# Altium PCB EpicPlus2.PcbDoc
Units mil, origin at the board's own origin, x right, y up, seen from the top; angles counter-clockwise.
Board outline 2500 x 1600 mil, 4 copper layers (Top Layer, Internal Plane 1, Internal Plane 2, Bottom Layer); 56 components, 96 nets, 236 pads, 16 vias.
Unrouted connection lines stored in the file: 123.
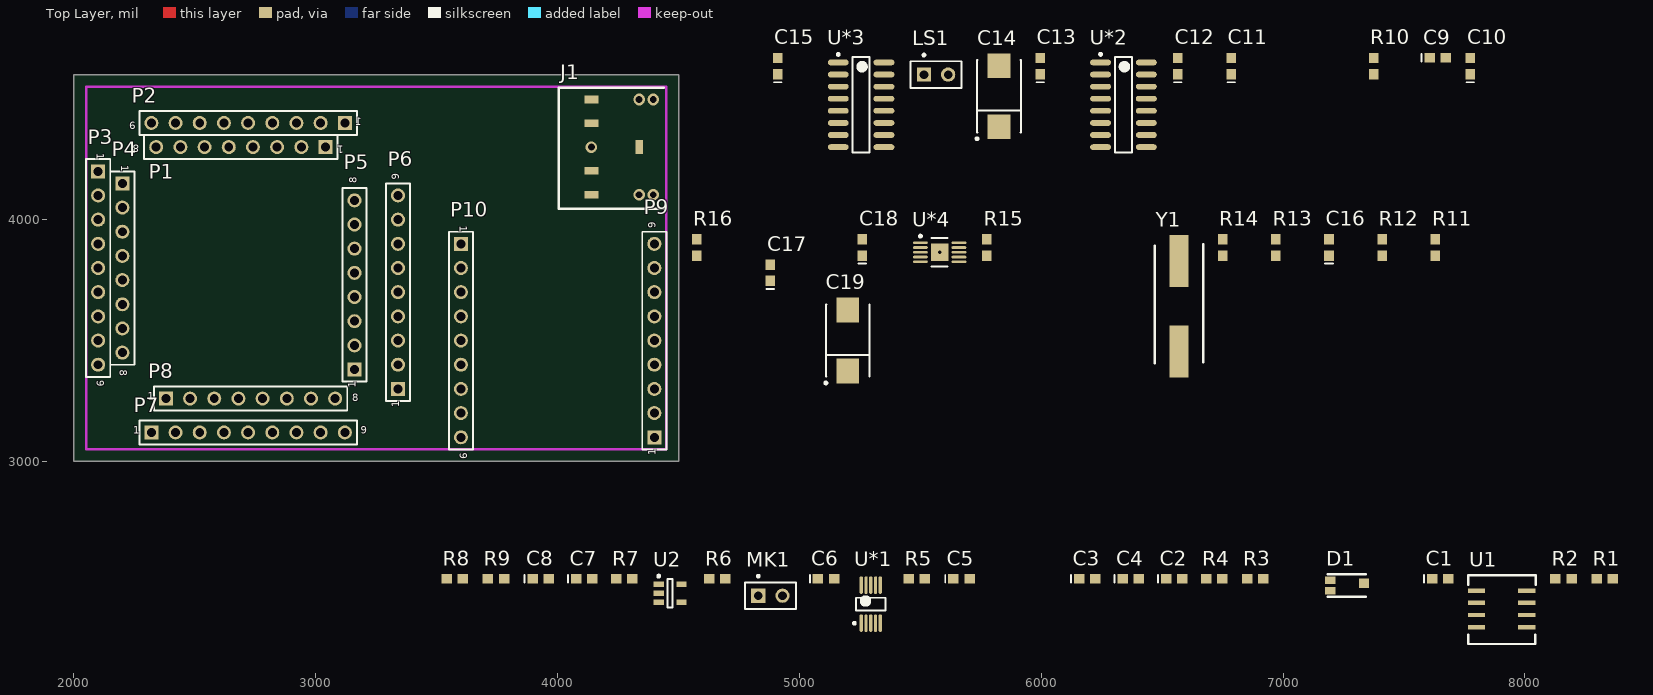
[diagram p0: Top Layer view]
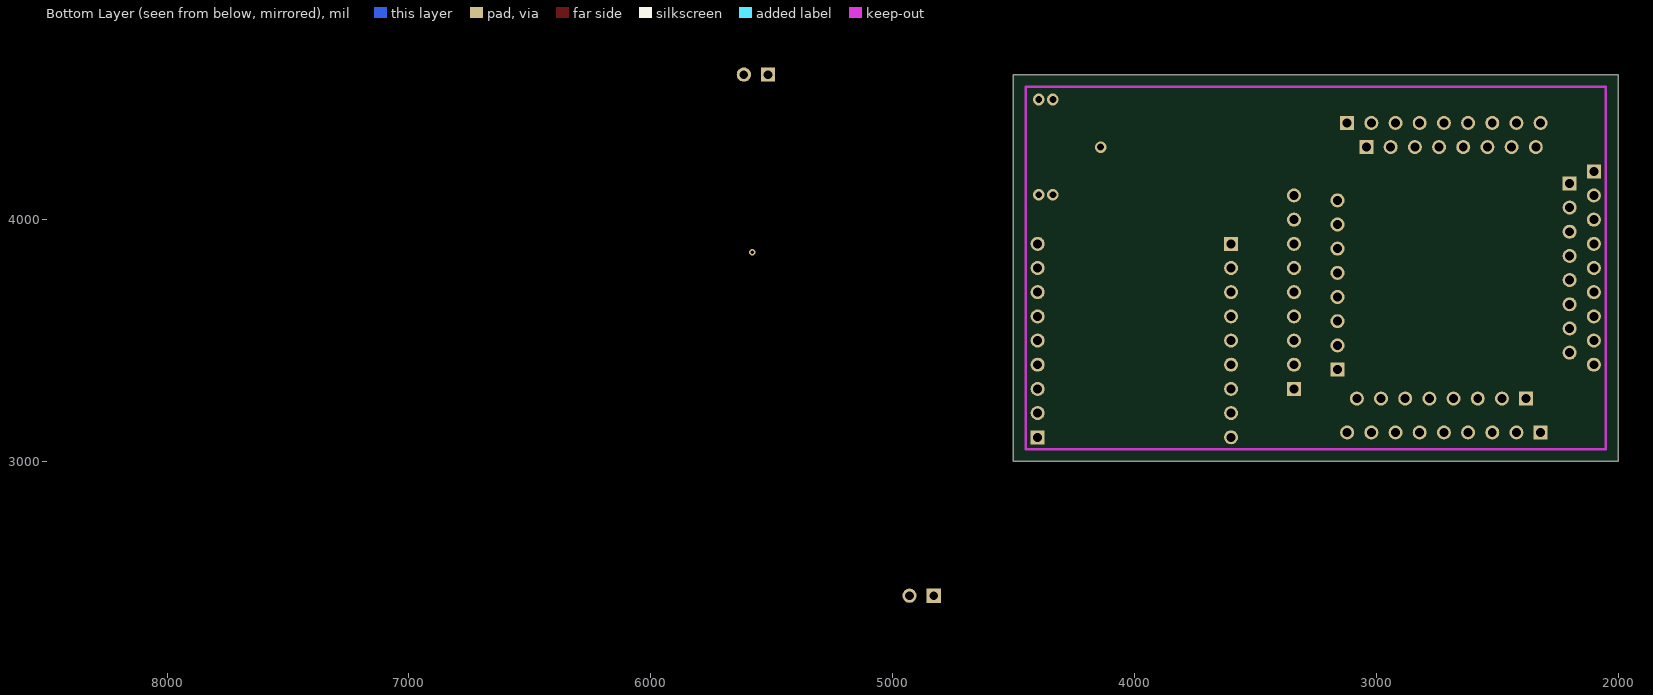
[diagram p1: Bottom Layer view, seen from below]
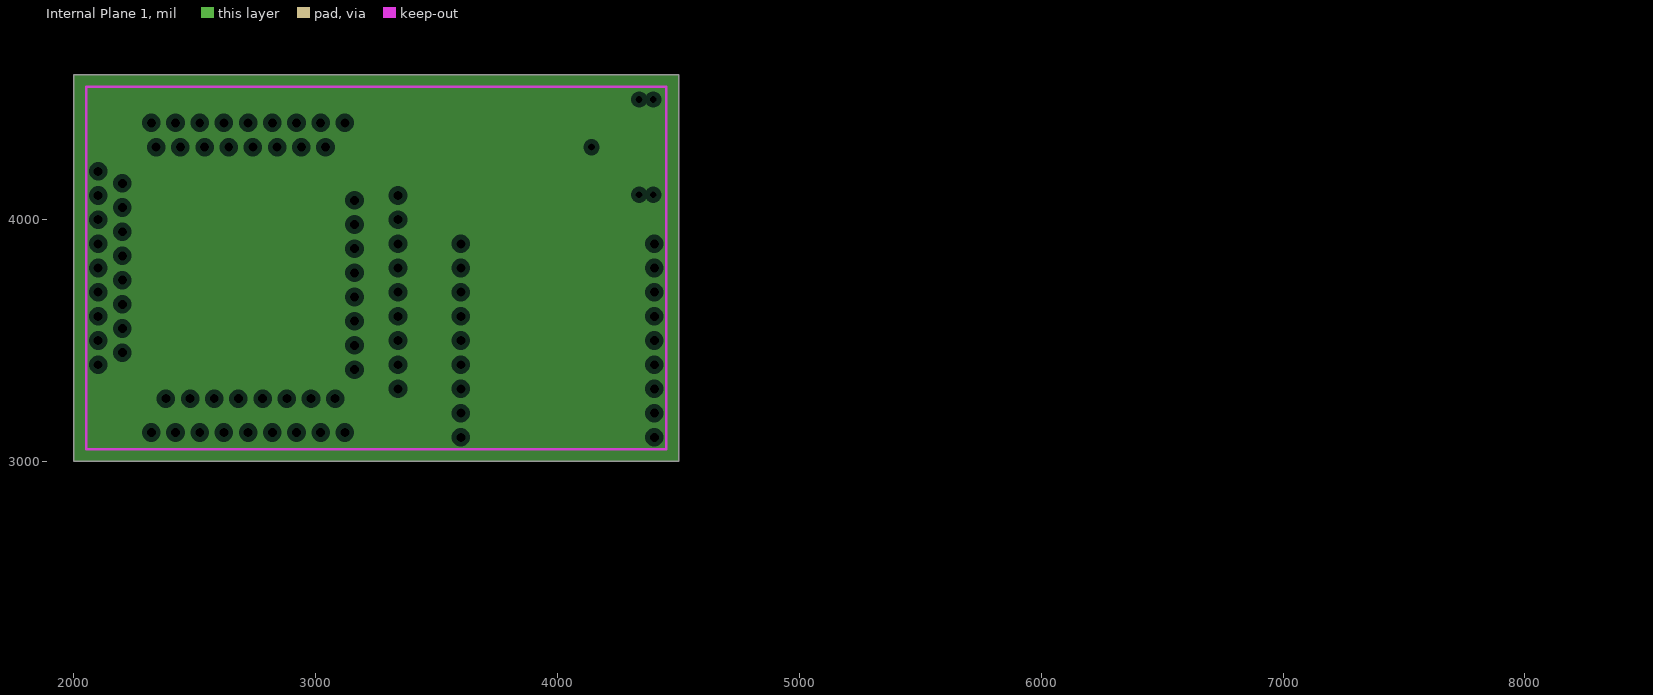
[diagram p2: Internal Plane 1, clearances drawn from the general rule]
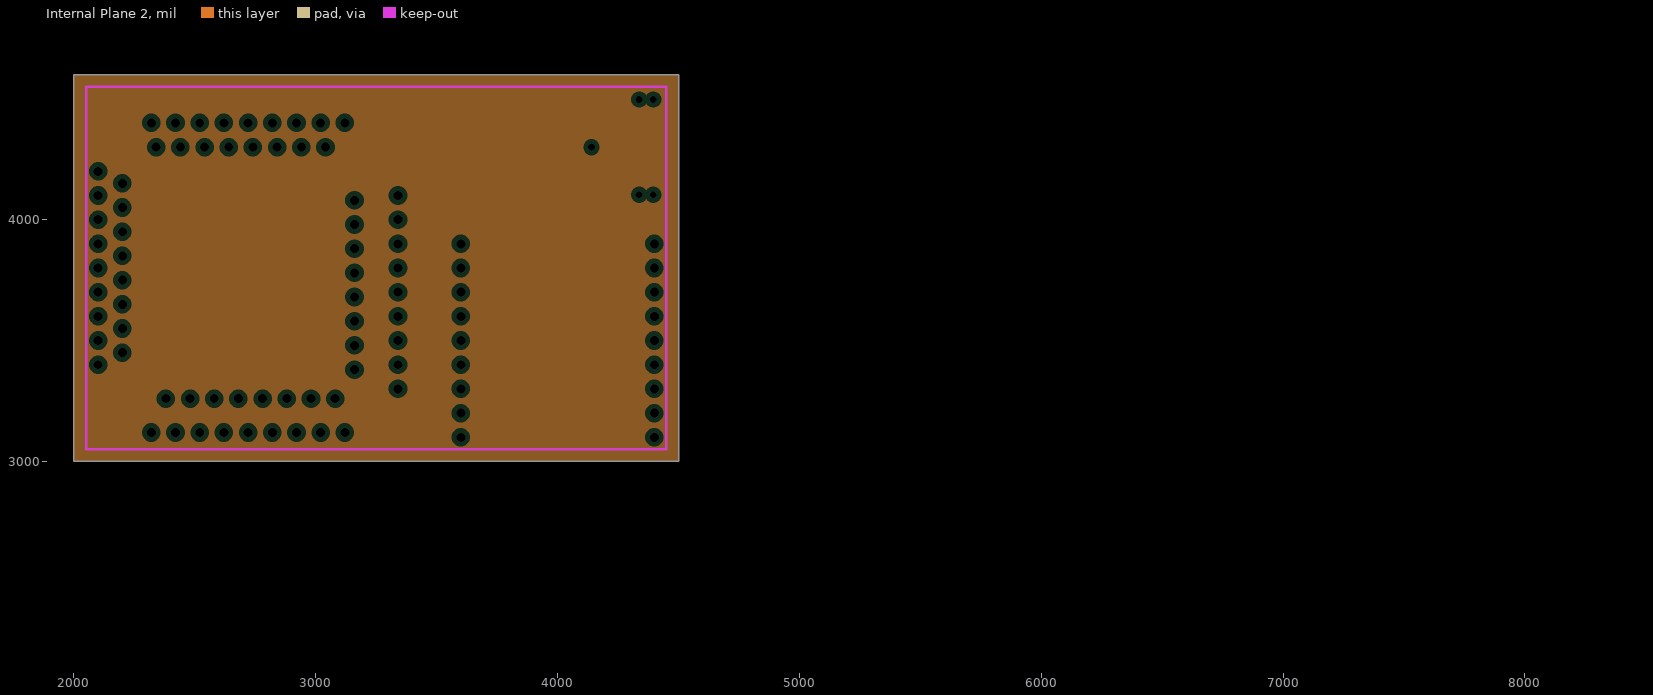
[diagram p3: Internal Plane 2, clearances drawn from the general rule]

## Layer stack, top to bottom
Top Layer: signal copper 1.4
Dielectric: dielectric 12.6, FR-4, Dk 4.8
Internal Plane 1: plane copper 1.4
Dielectric: dielectric 12.6, FR-4, Dk 4.8
Internal Plane 2: plane copper 1.4
Dielectric: dielectric 12.6, FR-4, Dk 4.8
Bottom Layer: signal copper 1.4

## Board outline
2000,3000 4500,3000 4500,4600 2000,4600

## Design rules (kind name [scope] priority, off if disabled: settings)
Clearance [All] p1: gap=8
ComponentClearance [All] p1: gap=10 collisioncheckmode=3 verticalgap=10
PlaneClearance [All] p1: clearance=20
PlaneConnect [All] p1: planeconnectstyle=Relief reliefexpansion=20 reliefentries=4 reliefconductorwidth=10 reliefairgap=10
PolygonConnect [All] p1: connectstyle=Relief reliefconductorwidth=10 reliefentries=4 polygonreliefangle="90 Angle"
RoomDefinition MainBoard [InComponentClass('MainBoard')] p1: confinementstyle=ConfineIn formatcopy=TRUE lockcomponents=FALSE outline 4545,2960 8600,2960 8600,4050 4545,4050
RoutingVias [All] p1: holewidth=25 width=40 viastyle="Through Hole" minholewidth=28 minwidth=50 maxholewidth=28 maxwidth=50
SolderMaskExpansion [All] p1: expansion=4
TestPointUsage [All] p1: valid=0 allowmultiple=FALSE
Testpoint [All] p1: side=15 testpointundercomponent=TRUE minsize=40 maxsize=100 preferedsize=60 minholesize=0 maxholesize=40 preferedholesize=32 testpointgrid=1 style=1023 order=0123456789
Width [All] p1: maxlimit=8 minlimit=8 preferedwidth=8
16 further rules are at their usual default settings.

## Components (designator, comment, footprint, x,y, rotation, side; value= is the part's Value field where it differs from the comment)
C1 "Cap" CC1608-0603 7650,2515 r0 top
C2 "Cap2" CC1608-0603 6550,2515 r0 top
C3 "Cap" CC1608-0603 6190,2515 r0 top
C4 "Cap2" CC1608-0603 6370,2515 r0 top
C5 "Cap2" CC1608-0603 5670,2515 r0 top
C6 "Cap" CC1608-0603 5110,2515 r0 top
C7 "Cap" CC1608-0603 4110,2515 r0 top
C8 "Cap2" CC1608-0603 3930,2515 r0 top
C9 "Cap" CC1608-0603 7640,4670 r0 top
C10 "Cap" CC1608-0603 7775,4635 r90 top
C11 "Cap2" CC1608-0603 6785,4635 r90 top
C12 "Cap2" CC1608-0603 6565,4635 r90 top
C13 "Cap2" CC1608-0603 5995,4635 r90 top
C14 "Cap2" D 5825,4510 r90 top
C15 "Cap" CC1608-0603 4910,4635 r90 top
C16 "Cap" CC1608-0603 7190,3885 r90 top
C17 "Cap" CC1608-0603 4880,3780 r90 top
C18 "Cap" CC1608-0603 5260,3885 r90 top
C19 "Cap2" D 5200,3500 r90 top
D1 "TEMD6010FX01" VISHAY/TEMD6010FX01 7195,2465 r0 top
J1 "SJ1-3525NG" CUI/PHONE_JACK_3.5mm 4140,4300 r180 top
LS1 "Speaker 8Ohm" PIN2 5515,4600 r0 top
MK1 "Mic2" PIN2 4830,2445 r0 top
P1 "Header 8" BLKCON.100/VH/TM1SQ/W.100/8 3040,4300 r180 top
P2 "Header 9" "BLKCON.100/VH/TM1SQ/W.100/9 - duplicate" 3120,4400 r180 top
P3 "Header 9" "BLKCON.100/VH/TM1SQ/W.100/9 - duplicate" 2100,4200 r270 top
P4 "Header 8" BLKCON.100/VH/TM1SQ/W.100/8 2200,4150 r270 top
P5 "Header 8" BLKCON.100/VH/TM1SQ/W.100/8 3160,3380 r90 top
P6 "Header 9" "BLKCON.100/VH/TM1SQ/W.100/9 - duplicate" 3340,3300 r90 top
P7 "Header 9" "BLKCON.100/VH/TM1SQ/W.100/9 - duplicate" 2320,3120 r0 top
P8 "Header 8" BLKCON.100/VH/TM1SQ/W.100/8 2380,3260 r0 top
P9 "Header 9" "BLKCON.100/VH/TM1SQ/W.100/9 - duplicate" 4400,3100 r90 top
P10 "Header 9" "BLKCON.100/VH/TM1SQ/W.100/9 - duplicate" 3600,3900 r270 top
R1 "Res3" CR1608-0603 8330,2515 r0 top
R2 "Res3" CR1608-0603 8160,2515 r0 top
R3 "Res3" CR1608-0603 6885,2515 r0 top
R4 "Res3" CR1608-0603 6715,2515 r0 top
R5 "Res3" CR1608-0603 5485,2515 r0 top
R6 "Res3" CR1608-0603 4660,2515 r0 top
R7 "Res3" CR1608-0603 4275,2515 r0 top
R8 "Res3" CR1608-0603 3575,2515 r0 top
R9 "Res3" CR1608-0603 3745,2515 r0 top
R10 "Res3" CR1608-0603 7375,4635 r90 top
R11 "Res3" CR1608-0603 7630,3885 r90 top
R12 "Res3" CR1608-0603 7410,3885 r90 top
R13 "Res3" CR1608-0603 6970,3885 r90 top
R14 "Res3" CR1608-0603 6750,3885 r90 top
R15 "Res3" CR1608-0603 5775,3885 r90 top
R16 "Res3" CR1608-0603 4575,3885 r90 top
U1 "SHT11" Sensirion/SHT11 7800,2315 r0 top
U2 "LMV931" SOT23127P600-8N 4465,2455 r0 top
U*1 "AD/SSM2167" MSOP127P600-8N 5295,2410 r90 top
U*2 "AD/AD5242-1m" SOIC127P600X175-16N 6340,4475 r0 top
U*3 "AD/AD5242-10k" SOIC127P600X175-16N 5255,4475 r0 top
U*4 "TI/TPA0233" TSSOP50P480X107_HS-10N 5580,3865 r0 top
Y1 "Crystal 8MHz" ECS/CSM-7SSX 6570,3455 r90 top

## Footprints (in the part's own frame and the unit in brackets; to place one, negate y for a bottom-side part, rotate by r counter-clockwise, add the part's x,y. Pads: shape width x height; smd on the part's side, far side on the other; paste and mask are expansions set on the pad)
BLKCON.100/VH/TM1SQ/W.100/8 [mil]
  rect 58x58 / inner round 60 / far side rect 58x58 hole 37: 1(0,0)
  round 58 / inner round 60 / far side round 58 hole 37: 2(100,0) 3(200,0) 4(300,0) 5(400,0) 6(500,0) 7(600,0) 8(700,0)
  silkscreen extent -50,-50 750,50
"BLKCON.100/VH/TM1SQ/W.100/9 - duplicate" [mil]
  rect 58x58 / inner round 60 / far side rect 58x58 hole 37: 1(0,0)
  round 58 / inner round 60 / far side round 58 hole 37: 2(100,0) 3(200,0) 4(300,0) 5(400,0) 6(500,0) 7(600,0) 8(700,0) 9(800,0)
  silkscreen extent -50,-50 850,50
CC1608-0603 [mm] "Chip Capacitor; Body 1.6 x 0.8 mm (LxW typ)"
  rect 1.1x1 smd: 1(-0.85,0) 2(0.85,0)
  silkscreen extent -1.7,-0.4 -1.7,0.4
CR1608-0603 [mm] "Chip Resistor; Body 1.6 x 0.8 mm (LxW typ)"
  rect 1.1x1 smd: 1(-0.85,0) 2(0.85,0)
CUI/PHONE_JACK_3.5mm [mm] "3.5mm Audio Jack Stereo"
  rect 0.8x1.5 smd: 1(-5,0)
  rect 1.5x0.8 smd: 2(0,-5) 3(0,5) 4(0,-2.5) 5(0,2.5)
  silkscreen extent -7.57,-6.22 3.43,6.48
D [mm] "Capacitor, SM Tantalum; Body 7.3 x 4.3 mm (LxW typ)"
  rect 2.6x2.4 smd: 1(-3.2,0) 2(3.2,0)
  silkscreen extent -4.57,-2.3 3.8,2.42
ECS/CSM-7SSX [mm] "Low Profile SMD Crystal from ECS"
  rect 5.5x2 smd: 1(0,0) 2(9.5,0)
  silkscreen extent -1.27,-2.54 11.26,2.54
MSOP127P600-8N [mm] "For AD SSM2167"
  oval 1.85x0.35 smd: 1(-2,1) 2(-2,0.5) 3(-2,0) 4(-2,-0.5) 5(-2,-1) 6(2,-1) 7(2,-0.5) 8(2,0) 9(2,0.5) 10(2,1)
  silkscreen extent -2.12,-1.55 0.67,1.85, body extent -1.55,-1.55 1.55,1.55, height 1.1
PIN2 [mm] "Photosensitive Diode; 2 Leads"
  rect 1.5x1.5 hole 0.9: 1(0,0)
  round 1.5 hole 0.9: 2(2.54,0)
  silkscreen extent -1.4,-1.4 3.94,2.17
Sensirion/SHT11 [mm] "Sensirion SHT11 footprint"
  rect 1.8x0.47 smd: 1(0,3.81) 2(0,2.54) 3(0,1.27) 4(0,0) NC(5.28,0) NC(5.28,1.27) NC(5.28,2.54) NC(5.28,3.81)
  silkscreen extent -0.89,-1.78 6.22,5.46
SOIC127P600X175-16N [mm] "SOIC, 16-Leads, Body 10.0x4.0mm (max), Pitch 1.27mm, IPC Medium Density, AD5242"
  oval 2.2x0.6 smd: 1(-2.4,4.445) 2(-2.4,3.175) 3(-2.4,1.905) 4(-2.4,0.635) 5(-2.4,-0.635) 6(-2.4,-1.905) 7(-2.4,-3.175) 8(-2.4,-4.445) 9(2.4,-4.445) 10(2.4,-3.175) 11(2.4,-1.905) 12(2.4,-0.635) 13(2.4,0.635) 14(2.4,1.905) 15(2.4,3.175) 16(2.4,4.445)
  silkscreen extent -2.52,-5 0.9,5.42, body extent -2,-5 2,5, height 1.75
SOT23127P600-8N [mm] "for TI LMV931 SOT-23-DBV package"
  rect 1.1x0.6 smd: 1(-1.2,0.95) 2(-1.2,0) 3(-1.2,-0.95) 4(1.2,-0.95) 5(1.2,0.95)
  silkscreen extent -1.32,-1.5 0.25,1.92, body extent -0.87,-1.52 0.87,1.53, height 1.45
TSSOP50P480X107_HS-10N [mm] "TSSOP, 10-Leads, Body 3.0x3.0mm (max), Pitch 0.50mm, IPC Medium Density, for TI/TPA0233"
  oval 1.55x0.3 smd: 1(-2.025,1) 2(-2.025,0.5) 3(-2.025,0) 4(-2.025,-0.5) 5(-2.025,-1) 6(2.025,-1) 7(2.025,-0.5) 8(2.025,0) 9(2.025,0.5) 10(2.025,1)
  rect 1.8x1.8 smd: 11(0,0)
  silkscreen extent -2.15,-1.5 0.85,1.82, body extent -1.53,-1.53 1.53,1.53, height 1.07
VISHAY/TEMD6010FX01 [mm] "Ambient Light Sensor"
  rect 1.1x0.8 smd: 1(0,0) 1(0,1.1)
  rect 1.1x1 smd: 2(3.55,0.8)
  silkscreen extent -0.25,-0.64 3.75,1.75

## Part data
C1 C2 C3 C4 C5 C6 C7 C8 C9 C10 C11 C12 C13 C14 C15 C16 C17 C18 C19: "Capacitor"
D1: library part Diode, "Default Diode"
J1: library part Switchcraft/4BHNTR
LS1: library part Speaker, "Loudspeaker"
MK1: "Microphone"
P1 P4 P5 P8: "Header, 8-Pin"
P2 P3 P6 P7 P9 P10: "Header, 9-Pin"
R1 R2 R3 R4 R5 R6 R7 R8 R9 R10 R11 R12 R13 R14 R15 R16: "Resistor"
U2: library part LMV321M5, "Single General-Purpose, Low-Voltage Rail-to-Rail Output Operational Amplifier"
U*2 U*3: library part AD/AD5242
Y1: library part CRYSTAL_0

## Via types
v1: diameter 47.64, hole 28, Top Layer to Bottom Layer, 15 vias
v2: diameter 25.98, hole 12.99, Top Layer to Bottom Layer, tented top, 1 vias

## Nets (pads, with @x,y where several pads share a name; then routed paths per layer and width w, separated by ;. In a path a pad name is that pad's centre, name@x,y a point inside that pad or via, vN(x,y) a via of type N, cw(c..) or ccw(c..) an arc to the next point about the centre after c; other vN are vias at no path point)
ADC0_EPIC: C9.2 P8.1 U2.3 U2.4
ADC1_EPIC: P7.2
ADC2_EPIC: C2.1 D1.1 P8.2 R3.1
ADC3_EPIC: P7.3
ADC4_EPIC: P8.3
ADC5_EPIC: P7.4
ADC6_EPIC: C15.2 C16.2 P8.4
ADC7_EPIC: P7.5
ATEST1_EPIC: P6.8
ATEST2_EPIC: P4.6
AVDD_EPIC: P3.9
CTS_BT: P10.4
FLASH_CS_EPIC: P4.1
FLASH_WP_EPIC: P6.2
FVDD_EPIC: P7.9
GND: C1.1 C2.2 C3.2 C4.2 C7.2 C10.2 C11.2 C12.2 C13.1 C17.1 C18.1 J1.5 MK1.1 P2.1 P3.1 P6.1 P7.1 P7.6 P8.6 P9.1 R3.2 R10.2 R12.2 R16.1 U1.1 U2.2 U*1.1 U*2.10 U*2.11 U*2.12 U*3.9 U*3.10 U*3.11 U*3.12 U*4.8
HUM_ON: C1.2 P3.2 R1.1 U1.4
HUM_SCL: P3.3 U1.3
HUM_SDA: P3.4 R1.2 U1.2
I2C0/SPI0_EPIC: P2.2
LED1_EPIC: P1.7 P8.8
LED2_EPIC: P2.8 P8.7
LED3_EPIC: P1.8
MIC_ON: P5.4 R4.1
MIC_POWER: C3.1 C4.1 R4.2 R5.1 R7.1 U2.5 U*1.3 U*1.10 U*2.4 U*3.4
MISO0_EPIC: P1.3
MOSI0/SDA_EPIC: P2.3 U*2.8 U*3.8
NetC5_1: C5.1 U*1.4
NetC5_2: C5.2 U*1.2
NetC6_1: C6.1 R6.2
NetC6_2: C6.2 MK1.2 R5.2
NetC7_1: C7.1 R6.1 U*1.5
NetC8_1: C8.1 U*1.9
NetC8_2: C8.2 R7.2 R8.1 R10.1
NetC9_1: C9.1 R8.2 R9.1
NetC10_1: C10.1 R9.2 U2.1
NetC11_1: C11.1 U*1.6
NetC12_1: C12.1 U*4.4
NetC13_2: C13.2 U*4.1
NetC14_1: C14.1 U*4.6
NetC14_2: C14.2 J1.4
NetC15_1: C15.1 R11.1
NetC16_1: C16.1 R13.1
NetC19_2: C19.2 J1.1 R16.2
NetD1_2: D1.2 R2.1
NetJ1_2: J1.2 R14.1 R15.2
NetJ1_3: J1.3 LS1.2
NetR11_2: R11.2 U*4.5
NetR13_2: R13.2 U*4.9
NetR15_1: R15.1 U*4.7
ONEWIRE_EPIC: P1.1
P1.2_EPIC: P4.7 P7.7
P1.6_EPIC: P7.8 P9.3
P2.0_EPIC: P4.2
P2.1_EPIC: P6.3 P10.5
P2.3_EPIC: P4.8 P10.6
P2.6_EPIC: P6.4 P10.7
P5.0_EPIC: P5.1 R2.2
P5.2_EPIC: P3.5 P5.2 U*4.2
P5.4_EPIC: P5.3 R12.1 U*2.6 U*3.6
PCM_CLK_BT: P9.5
PCM_IN_BT: P9.7
PCM_OUT_BT: P9.8
PCM_SYNC_BT: P9.6
RADIO_CCA_EPIC: P4.3
RADIO_CS_EPIC: P6.7
RFGND1_EPIC: P4.4
RFGND2_EPIC: P4.5
RFOUT_EPIC: P6.5
RFTXRX_EPIC: P6.6
RST/NMI_EPIC: P5.8
RTS_BT: P10.3
RVDD_EPIC: P6.9
RX_BT: P1.4 P10.1
SCLK0/SCL_EPIC: P2.4 U*2.7 U*3.7
SPI_CLK_BT: P9.4
SPI_CSB_BT: P10.8
SPI_MISO_BT: P10.9
SPI_MOSI_BT: P9.2
SPK_LO: C19.1 LS1.1 U*4.10
STE0_EPIC: P1.2
TCK_EPIC: P3.8
TDI/TCLK_EPIC: P3.7
TDO/TDI_EPIC: P5.6
TMS_EPIC: P5.7
TX_BT: P2.5 P10.2
UART1RX_EPIC: P2.6
UART1TX_EPIC: P1.5
VDD: P2.9 P9.9 R14.2 U*2.5 U*2.9 U*3.5 U*4.3
VRC: U*1.8 U*2.3
VREF+_EPIC: P8.5
VRG: U*1.7 U*3.3
XOSC16IN: P2.7
XOSC16OUT: P1.6
XT2IN_EPIC: C18.2 P5.5 Y1.2
XT2OUT_EPIC: C17.2 P3.6 Y1.1
pads on no net: U1.NC U*2.1 U*2.2 U*2.13 U*2.14 U*2.15 U*2.16 U*3.1 U*3.2 U*3.13 U*3.14 U*3.15 U*3.16 U*4.11
copper on no net:
  other v1: 4336.85,4103.15 4336.85,4103.15 4336.85,4103.15 4395.91,4103.15 4395.91,4103.15 4395.91,4103.15 4140,4300 4140,4300 4140,4300 4336.85,4496.85 4336.85,4496.85 4336.85,4496.85 4395.91,4496.85 4395.91,4496.85 4395.91,4496.85
  other v2: 5580,3865

## Polygon pours and split planes (outlines as drawn)
no net on Internal Plane 1 (split plane): 4500,3000 2000,3000 2000,4600 4500,4600
no net on Internal Plane 2 (split plane): 4500,3000 2000,3000 2000,4600 4500,4600

## Keep-outs
Keep-Out Layer:
  lines w10: 2050,3050 2050,4550 4450,4550 4450,3050 2050,3050

## Silkscreen, mask and mechanical layers (free items; w line width, h text height)
Drill Drawing:
  text ".LEGEND" at 4700,3200 h60
  text "Drill Drawing." at 4700,3100 h60

## Dimensions
2050,3050 to 2050,4550 on Mechanical 1
2050,3050 to 4450,3050 on Mechanical 1

## Text inside footprints (layer, text, board x,y; h text height)
P1: Top Overlay "1" at 3115,4305 h30 r180; Top Overlay "8" at 2270,4310 h30 r180
P2: Top Overlay "1" at 3190,4390 h30; Top Overlay "9" at 2255,4405 h30 r180
P3: Top Overlay "1" at 2095,4275 h30 r270; Top Overlay "9" at 2095,3335 h30 r270
P4: Top Overlay "1" at 2195,4225 h30 r270; Top Overlay "8" at 2190,3380 h30 r270
P5: Top Overlay "1" at 3165,3305 h30 r90; Top Overlay "8" at 3170,4150 h30 r90
P6: Top Overlay "1" at 3345,3225 h30 r90; Top Overlay "9" at 3345,4165 h30 r90
P7: Top Overlay "1" at 2245,3115 h30; Top Overlay "9" at 3185,3115 h30
P8: Top Overlay "1" at 2305,3255 h30; Top Overlay "8" at 3150,3250 h30
P9: Top Overlay "1" at 4405,3025 h30 r90; Top Overlay "9" at 4405,3965 h30 r90
P10: Top Overlay "1" at 3595,3975 h30 r270; Top Overlay "9" at 3595,3035 h30 r270